# Altium PCB MMS3100加热_V0.1.PcbDoc
Units mil, origin at the board's own origin, x right, y up, seen from the top; angles counter-clockwise.
Board outline 3937.01 x 1968.5 mil, 2 copper layers (Top Layer, Bottom Layer); 55 components, 44 nets, 160 pads, 35 vias.
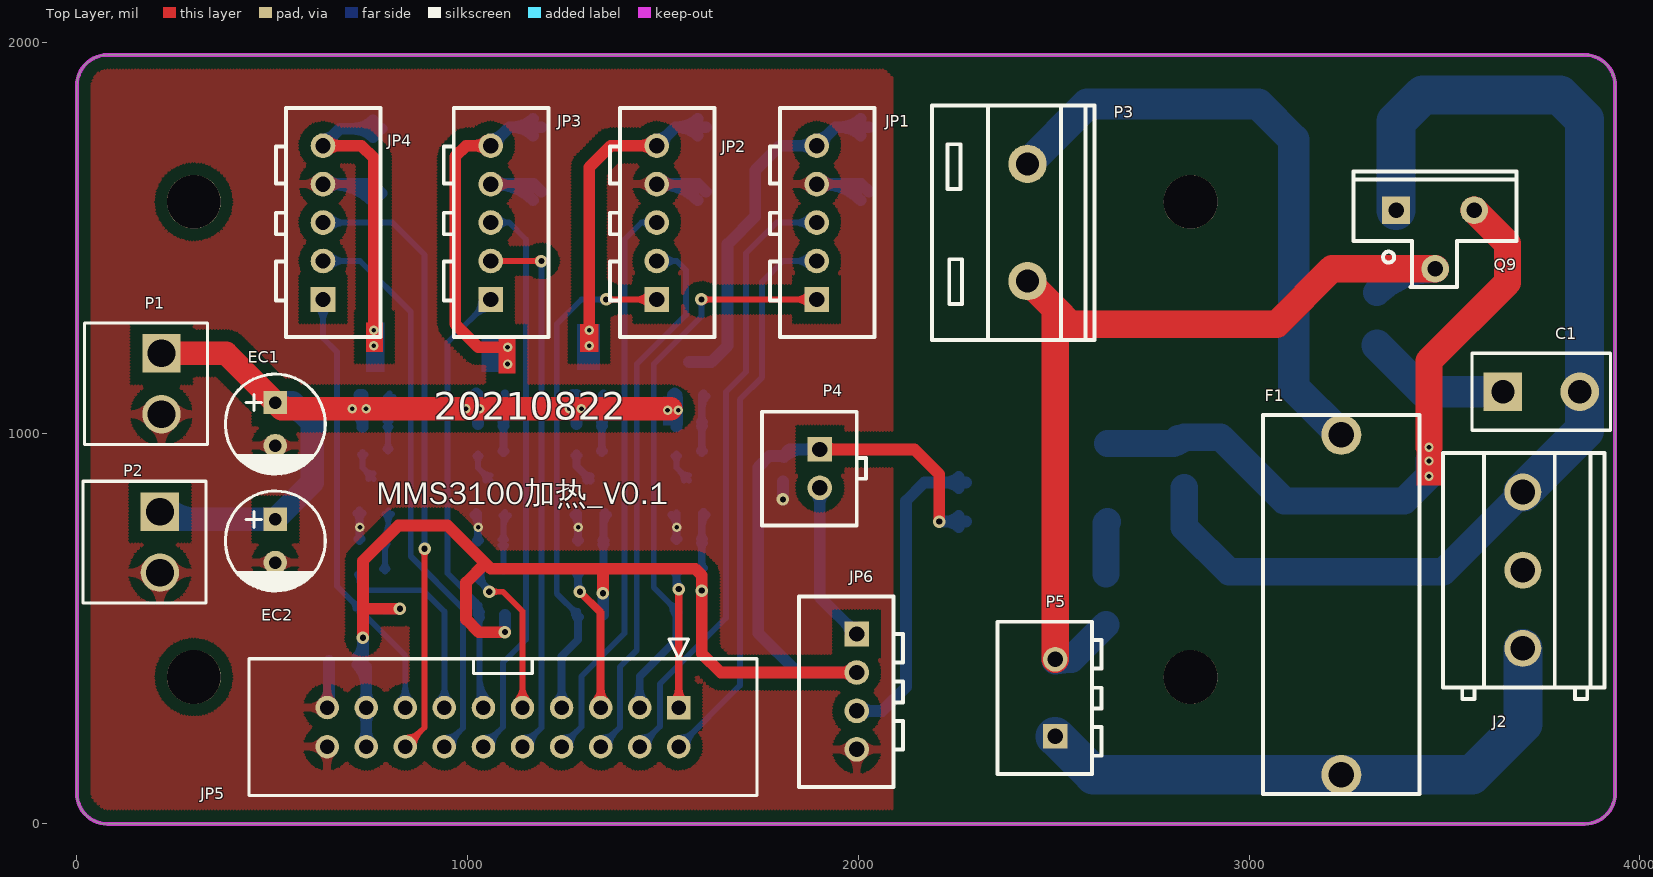
[diagram p0: Top Layer view]
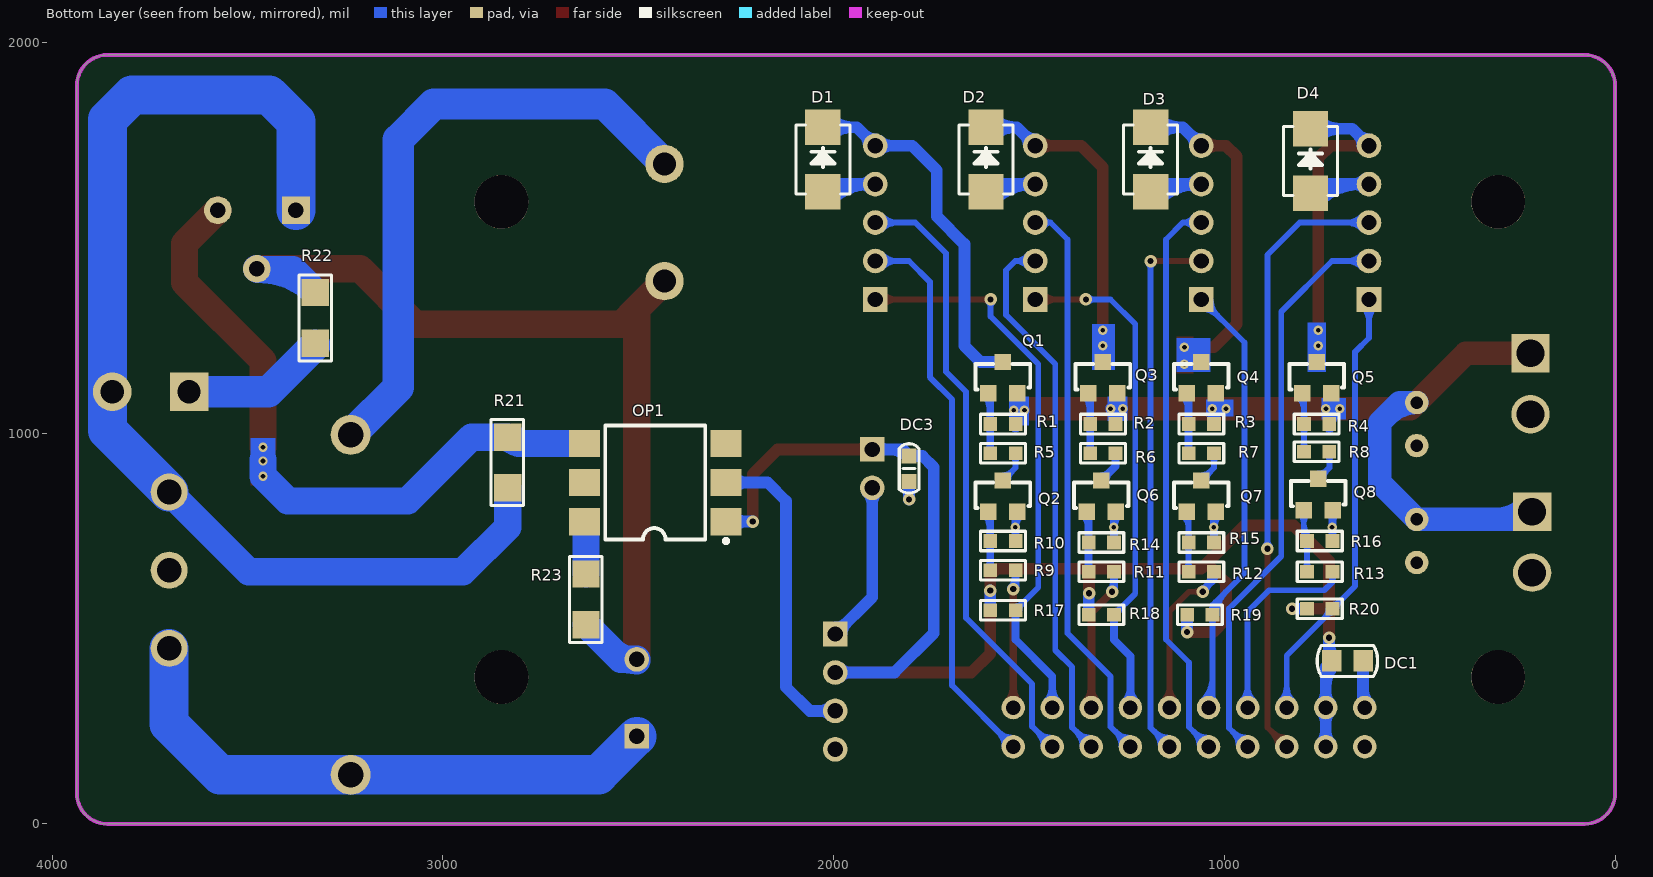
[diagram p1: Bottom Layer view, seen from below]

## Layer stack, top to bottom
Top Layer: signal copper 1.4
Dielectric: dielectric 12.6, FR-4, Dk 4.8
Bottom Layer: signal copper 1.4

## Board outline
0,78.74 0,1889.76 cw(c78.74,1889.76) 78.74,1968.5 3858.27,1968.5 cw(c3858.27,1889.76) 3937.01,1889.76 3937.01,78.74 cw(c3858.27,78.74) 3858.27,0 78.74,0 cw(c78.74,78.74)

## Design rules (kind name [scope] priority, off if disabled: settings)
Clearance Clearance_3 [InComponent('U6')] p1: gap=7
Clearance Clearance_2 [InComponent('J1') vs OnLayer('Keep-Out Layer')] p2: gap=0
Clearance [(InPoly)] p3: gap=30
Clearance Clearance_1 [All] p4: gap=6
FabricationTestPointUsage TestPointUsage [All] p1: valid=0 allowmultiple=FALSE
FabricationTestpoint Testpoint [All] p1: side=3 testpointundercomponent=TRUE minsize=40 maxsize=100 preferedsize=60 minholesize=20 maxholesize=40 preferedholesize=32 testpointgrid=1 allowsidetop=TRUE allowsidebottom=TRUE usegrid=TRUE gridtolerance=0.01
HoleSize [All] p1: absolutevalues=TRUE maxlimit=1000 minlimit=1 maxpercent=80.000 minpercent=20.000
MinimumSolderMaskSliver [All] p1 off: minsoldermaskwidth=10
PlaneConnect [All] p1: planeconnectstyle=Relief reliefexpansion=20 reliefentries=2 reliefconductorwidth=30 reliefairgap=10
PolygonConnect PolygonConnect_1 [InNet('EXT_GND')] p1: connectstyle=Direct reliefconductorwidth=10 reliefentries=4 polygonreliefangle="90 Angle"
PolygonConnect VIA [ViaSize] p2: connectstyle=Direct reliefconductorwidth=10 reliefentries=4 polygonreliefangle="90 Angle"
PolygonConnect [All] p3: connectstyle=Relief reliefconductorwidth=20 reliefentries=4 polygonreliefangle="90 Angle"
RoutingVias [All] p1: holewidth=16 width=30 viastyle="Through Hole" minholewidth=12 minwidth=24 maxholewidth=100 maxwidth=500
SilkToSilkClearance [All] p1 off: silktosilkclearance=10
SilkscreenOverComponentPads [All] p1 off: minsilkscreentomaskgap=10
SolderMaskExpansion [All] p1 off: expansion=4
Width Width_GND [InNet('GND')] p1: maxlimit=100 minlimit=1 preferedwidth=20 minimp=50.000000 maximp=50.000000 favimp=50.000000
Width Width_POWER [InNet('+3.3V') and InNet('VCC')] p2: maxlimit=100 minlimit=10 preferedwidth=20
Width [All] p3: maxlimit=400 minlimit=1 preferedwidth=10
21 further rules are at their usual default settings.

## Components (designator, comment, footprint, x,y, rotation, side; value= is the part's Value field where it differs from the comment)
C1 "0.01uF" 瓷片电容5MM 3649.61,1106.3 r0 top
D1 "SS34" SMA 2027.56,1700.79 r270 bottom
D2 "SS34" SMA 1610.24,1700.79 r270 bottom
D3 "SS34" SMA 1188.98,1700.79 r270 bottom
D4 "SS34" SMA 779.53,1696.85 r270 bottom
DC1 "10uF/16V" C0805 685.04,417.32 r180 bottom
DC3 "0.1uF" C0603 1807.09,909.45 r180 bottom
EC1 "220uF/25V" 16MV220SAX 507.87,1078.74 r270 top
EC2 "220uF/25V" 16MV220SAX 507.87,779.53 r270 top
F1 "Fuse 2" FUSE-2 3236.22,125.98 r90 top
J2 "CON3" KF5.08-3P 3700.79,649.61 r90 top
JP1 "HX25035-5A" HX25035-5A 1893.7,1539.37 r90 top
JP2 "HX25035-5A" HX25035-5A 1484.25,1539.37 r90 top
JP3 "HX25035-5A" HX25035-5A 1059.06,1539.37 r90 top
JP4 "HX25035-5A" HX25035-5A 629.92,1539.37 r90 top
JP5 "NJ-20" 130-20TRK 1090.55,248.03 r180 top
JP6 "XH-4A" HX25035-4A 1996.06,338.58 r270 top
OP1 "MOC3063S" SMD-6 2456.69,874.02 r90 bottom
P1 "Header 2" VH3.96-2 216.54,1204.72 r270 top
P2 "Header 2" VH3.96-2 212.6,799.21 r270 top
P3 "Header 2" WJ129V-7.62-2P 2433.07,1539.37 r270 top
P4 "Header 2" HX25035-2A 1901.57,909.45 r270 top
P5 "Header 2" XH2-220V 2503.94,322.83 r270 top
Q1 "AO3401" SOT-23MOS 1566.93,1102.36 r180 bottom
Q2 "S8050" 8050 1566.93,799.21 r180 bottom
Q3 "AO3401" SOT-23MOS 1311.02,1102.36 r180 bottom
Q4 "AO3401" SOT-23MOS 1059.05,1102.36 r180 bottom
Q5 "AO3401" SOT-23MOS 763.78,1102.36 r180 bottom
Q6 "S8050" 8050 1314.96,799.21 r180 bottom
Q7 "S8050" 8050 1059.05,799.21 r180 bottom
Q8 "S8050" 8050 759.84,803.15 r180 bottom
Q9 "T835-600B-TR" TO-220-3 3476.38,1570.87 r0 top (schematic designator Q1)
R1 "10K" R0603 1566.93,1023.62 r90 bottom
R2 "10K" R0603 1311.02,1023.62 r90 bottom
R3 "10K" R0603 1059.05,1023.62 r90 bottom
R4 "10K" R0603 763.78,1023.62 r90 bottom
R5 "10K" R0603 1566.93,948.82 r270 bottom
R6 "10K" R0603 1311.02,948.82 r270 bottom
R7 "10K" R0603 1059.05,948.82 r270 bottom
R8 "10K" R0603 763.78,952.76 r270 bottom
R9 "4.7K" R0603 1566.93,649.61 r270 bottom
R10 "10K(NC)" R0603 1566.93,724.41 r270 bottom
R11 "4.7K" R0603 1314.96,645.67 r270 bottom
R12 "4.7K" R0603 1059.06,645.67 r270 bottom
R13 "4.7K" R0603 755.91,645.67 r270 bottom
R14 "10K(NC)" R0603 1314.96,720.47 r270 bottom
R15 "10K(NC)" R0603 1059.05,720.47 r270 bottom
R16 "10K(NC)" R0603 755.91,724.41 r270 bottom
R17 "4.7K" R0603 1566.93,547.24 r270 bottom
R18 "4.7K" R0603 1314.96,535.43 r270 bottom
R19 "4.7K" R0603 1062.99,535.43 r270 bottom
R20 "4.7K" R0603 755.91,551.18 r270 bottom
R21 "360R" R1206 2834.65,925.2 r180 bottom
R22 "39R" R1206 3326.77,1295.28 r180 bottom
R23 "360R" R1206 2633.86,574.8 r180 bottom

## Footprints (in the part's own frame and the unit in brackets; to place one, negate y for a bottom-side part, rotate by r counter-clockwise, add the part's x,y. Pads: shape width x height; smd on the part's side, far side on the other; paste and mask are expansions set on the pad)
16MV220SAX [mil]
  rect 60x60 / inner round 60 / far side round 60 hole 32: 1(0,0)
  round 60 hole 32: 2(110.24,0)
  silkscreen extent -73,-128 183,128
130-20TRK [mil]
  rect 60x60 / inner round 60 / far side round 60 hole 37: 1(-450,-50)
  round 60 hole 37: 2(-450,50) 3(-350,-50) 4(-350,50) 5(-250,-50) 6(-250,50) 7(-150,-50) 8(-150,50) 9(-50,-50) 10(-50,50) 11(50,-50) 12(50,50) 13(150,-50) 14(150,50) 15(250,-50) 16(250,50) 17(350,-50) 18(350,50) 19(450,-50) 20(450,50)
  silkscreen extent -650,-225 650,175
8050 [mil]
  rect 42x42 smd: B(-37,0) C(0,80) E(37,0)
  silkscreen extent -70,10 70,75
C0603 [mil]
  rect 38x38 smd: 1(0,32.5) 2(0,-32.5)
  silkscreen extent -25,-62 25,64
C0805 [mil]
  rect 50x55 smd: 1(-40,0) 2(40,0)
  silkscreen extent -77,-39 77,39
FUSE-2 [mm]
  round 2.6 hole 1.651: 1(0,0) 2(22.098,0)
  silkscreen extent -1.25,-5.08 23.4,5.08
HX25035-2A [mm]
  rect 1.6x1.6 hole 1: 1(-1.25,0)
  round 1.6 hole 1: 2(1.25,0)
  silkscreen extent -3.7,-3.75 3.7,3
HX25035-4A [mm]
  rect 1.6x1.6 hole 1: 1(-3.75,0)
  round 1.6 hole 1: 2(-1.25,0) 3(1.25,0) 4(3.75,0)
  silkscreen extent -6.2,-3.75 6.2,3
HX25035-5A [mm]
  rect 1.6x1.6 hole 1: 1(-5,0)
  round 1.6 hole 1: 2(-2.5,0) 3(0,0) 4(2.5,0) 5(5,0)
  silkscreen extent -7.45,-3.75 7.45,3.05
KF5.08-3P [mm]
  round 2.4 hole 1.6: 1(-5.08,0) 2(0,0) 3(5.08,0)
  silkscreen extent -8.38,-5.3 7.62,5.2
R0603 [mil]
  rect 35x35 smd: 1(0,32.5) 2(0,-32.5)
  silkscreen extent -25,-58 25,58
R1206 [mil]
  rect 70x70 smd: 1(0,65) 2(0,-65)
  silkscreen extent -42,-110 41,110
SMA [mm]
  rect 2.3x2.3 smd: 1(2.1,0) 2(-2.1,0)
  silkscreen extent -2.25,-1.75 2.25,1.75
SMD-6 [mm]
  rect 1.78x2 smd: 1(-2.54,-4.6) 2(0,-4.6) 3(2.54,-4.6) 4(2.54,4.6) 5(0,4.6) 6(-2.54,4.6)
  silkscreen extent -3.94,-4.74 3.7,3.25
SOT-23MOS [mil]
  rect 42x42 smd: D(0,80) G(-37,0) S(37,0)
  silkscreen extent -70,10 70,75
TO-220-3 [mm]
  rect 1.8x1.8 hole 1: 1(-2.54,0)
  round 1.8 hole 1: 2(0,-3.81) 3(2.54,0)
  silkscreen extent -5.3,-5 5.3,2.51
VH3.96-2 [mm]
  rect 2.5x2.5 / inner round 2.5 / far side rect 2.5x2.5 hole 1.8: 1(0,0)
  round 2.5 hole 1.8: 2(3.96,0)
  silkscreen extent -1.98,-5 5.94,3
WJ129V-7.62-2P [mm]
  round 2.5 hole 1.5: 1(-3.81,0) 2(3.81,0)
  silkscreen extent -7.61,-6.21 7.64,4.35
XH2-220V [mm]
  rect 1.6x1.6 hole 1: 1(2.5,0)
  round 1.6 hole 1: 2(-2.5,0)
  silkscreen extent -4.95,-3.75 4.95,3
瓷片电容5MM [mm]
  rect 2.5x2.5 hole 1.5: 1(0,0)
  round 2.5 hole 1.5: 2(5,0)
  silkscreen extent -2,-2.5 7,2.5

## Part data
D1 D2 D3 D4: library part DIODE, "Diode"
DC1: library part CAP
DC3: library part CA
EC1 EC2: library part CAP_POL
F1: "Fus"
J2 JP6: library part CON
JP1 JP2 JP3 JP4: library part SIP5
OP1: library part MOC3063
P1 P2 P4: "Header, 2-Pin"
P3 P5: "Header, 2-Pi"
Q1 Q3 Q4 Q5: library part MOSFET-P, "P-Channel MOSFET"
Q2 Q6 Q7 Q8: library part NPN8050
R1 R2 R3 R4 R5 R6 R7 R8 R9 R10 R11 R12 R13 R14 R15 R16 R17 R18 R19 R20: library part R

## Free pads (board coordinates)
  round 137.8 hole 137.8: 0(299.21,1592.52) 1(299.21,375.98) 2(2850.39,375.98) 3(2850.39,1592.52)

## Via types
v1: diameter 24, hole 12, Top Layer to Bottom Layer, 21 vias
v2: diameter 32, hole 16, Top Layer to Bottom Layer, 14 vias

## Nets (pads, with @x,y where several pads share a name; then routed paths per layer and width w, separated by ;. In a path a pad name is that pad's centre, name@x,y a point inside that pad or via, vN(x,y) a via of type N, cw(c..) or ccw(c..) an arc to the next point about the centre after c; other vN are vias at no path point)
12V: EC1.1 EC2.1 P1.1 P2.1 Q1.S Q3.S Q4.S Q5.S R1.2 R2.2 R3.2 R4.2 | length 3069.4
  Top Layer w60: P1.1 381.89,1204.72 EC1.1 ; 545.89,1062.99 cw(c545.89,1116.76) EC1.1 ; v1@1519.69,1062.99 v1(1291.34,1062.99) v1(1259.84,1062.99) v1(1031.5,1062.99) v1(996.06,1062.99) v1(740.16,1062.99) v1(704.72,1062.99) 523.62,1062.99 EC1.1
  Bottom Layer w30: v1@705.84,1060.21 ccw(c690.69,1097.86) 731.28,1097.86 R4.2 ; v1@706.54,1065.38 cw(c668.64,1015.51) R4.2@731.28,1015.51 ; Q5.S@722.54,1098.12 cw(c701.43,1077.01) 731.28,1077.01 ; 731.28,1048.8 cw(c754.35,1048.8) v1@738.04,1065.11 ; 731.28,1077.18 ccw(c754.35,1077.18) v1@738.04,1060.87 ; Q4.S@1017.81,1098.12 cw(c996.71,1077.01) 1026.56,1077.01 ; Q4.S 1026.55,1097.86 R3.2 ; v1@1261.83,1060.75 ccw(c1228.92,1097.86) 1278.52,1097.86 R2.2 ; v1@1261.96,1065.11 cw(c1221.99,1025.13) R2.2@1278.52,1025.13 ; Q3.S@1269.78,1098.12 cw(c1248.67,1077.01) 1278.52,1077.01 ; R2.2@1278.52,1039.3 cw(c1315.03,1039.3) v1@1289.22,1065.11 ; Q3.S@1278.52,1086.69 ccw(c1315.03,1086.69) v1@1289.22,1060.87 ; v1@1513.59,1056.64 ccw(c1483.24,1097.86) Q1.S@1534.43,1097.86 ; v1@1513.74,1061.35 cw(c1476.59,1017.02) R1.2@1534.43,1017.02 ; Q1.S@1525.69,1098.12 cw(c1504.58,1077.01) 1534.43,1077.01 ; Q1.S Q1.S@1534.43,1097.86 ; R1.2 Q1.S@1534.43,1097.86
  Bottom Layer w60: P2.1 232.28,779.53 EC2.1 602.36,874.02 602.36,1027.56 551.18,1078.74 EC1.1 cw(c507.87,974.19) 581.8,1048.12 ; P2.1@226.18,812.8 ccw(c306.51,893.12) 306.51,779.53
  other v1: 1511.81,1059.06 1539.37,1059.06
CW1: JP1.3 JP5.4 | length 1765.3
  Bottom Layer w15: JP5.4 1492.13,249.61 1492.13,358.27 1661.42,527.56 1661.42,1106.3 1712.6,1157.48 1712.6,1460.63 1791.34,1539.37 JP1.3 ; JP5.4@1440.55,220.53 ccw(c1440.55,274.85) 1478.96,236.44 ccw(c1517.37,198.03) JP5.4@1463.05,198.03 ; JP1.3@1876.73,1522.4 ccw(c1835.77,1481.44) 1835.77,1539.37 ccw(c1835.77,1597.3) JP1.3@1876.73,1556.34
CW2: JP2.3 JP5.8 | length 1595.1
  Bottom Layer w15: JP5.8 1291.34,248.82 1291.34,377.95 1401.57,488.19 1401.57,1496.06 1444.88,1539.37 ; JP5.8@1240.55,220.53 ccw(c1240.55,274.85) 1278.96,236.44 ccw(c1317.37,198.03) JP5.8@1263.05,198.03 ; JP2.3@1462.92,1528.37 ccw(c1444.88,1519.07) 1444.88,1539.37 ; JP2.3@1462.92,1550.37 cw(c1444.88,1559.67) 1444.88,1539.37 ; JP2.3 1444.88,1539.37
CW3: JP3.3 JP5.12 | length 1601.9
  Bottom Layer w15: JP5.12 1090.55,248.03 1090.55,413.39 1149.61,472.44 1149.61,1496.06 1106.3,1539.37 ; JP5.12@1040.55,220.53 ccw(c1040.55,274.85) 1078.96,236.44 ccw(c1117.37,198.03) JP5.12@1063.05,198.03 ; JP3.3 1106.3,1539.37 ; JP3.3@1078.43,1525.22 cw(c1106.3,1504.87) 1106.3,1539.37 ; JP3.3@1078.43,1553.52 ccw(c1106.3,1573.87) 1106.3,1539.37
CW4: JP4.3 JP5.16 | length 1813.9
  Top Layer w15: JP5.16 889.76,247.24 v2(889.76,704.72) ; JP5.16@840.55,220.53 ccw(c840.55,274.85) 878.96,236.44 ccw(c917.37,198.03) JP5.16@863.05,198.03 ; v2@883.75,698.71 cw(c869.24,684.2) 889.76,684.2 cw(c910.28,684.2) v2@895.77,698.71
  Bottom Layer w15: JP4.3 807.09,1539.37 889.76,1456.69 v2(889.76,704.72) ; JP4.3@646.89,1522.4 cw(c687.85,1481.44) 687.85,1539.37 cw(c687.85,1597.3) JP4.3@646.89,1556.34 ; v2@883.75,710.73 ccw(c869.24,725.25) 889.76,725.25 ccw(c910.28,725.25) v2@895.77,710.73
FG1: JP1.1 JP5.3 R17.1 | length 1750.9
  Top Layer w15: v2(1598.43,1342.52) JP1.1 ; v2@1604.44,1336.51 cw(c1618.95,1322) 1618.95,1342.52 cw(c1618.95,1363.04) v2@1604.44,1348.53 ; JP1.1@1876.73,1325.55 ccw(c1835.77,1284.59) 1835.77,1342.52 ccw(c1835.77,1400.45) JP1.1@1876.73,1359.49
  Bottom Layer w15: R17.1@1524.43,547.24 ccw(c1500.29,547.24) 1517.36,564.32 ccw(c1534.43,581.39) R17.1@1534.43,557.24 ; R17.1 1476.38,605.3 1476.38,1177.17 1598.43,1299.21 v2(1598.43,1342.52) ; v2@1592.41,1336.51 cw(c1577.9,1322) 1598.43,1322 cw(c1618.95,1322) v2@1604.44,1336.51
  Bottom Layer w20: JP5.3@1426.41,312.17 ccw(c1392.27,346.32) 1440.55,346.32 ccw(c1488.84,346.32) JP5.3@1454.69,312.17 ; JP5.3 1440.55,377.56 1534.43,471.44 R17.1 ; R17.1@1529.13,541.94 cw(c1516.32,529.14) 1534.43,529.14 cw(c1552.54,529.14) R17.1@1539.73,541.94
FG2: JP2.1 JP5.7 R18.1 | length 1600.9
  Top Layer w15: v2(1354.33,1342.52) JP2.1 ; v2@1360.34,1336.51 cw(c1374.85,1322) 1374.85,1342.52 cw(c1374.85,1363.04) v2@1360.34,1348.53 ; JP2.1@1467.28,1325.55 ccw(c1426.32,1284.59) 1426.32,1342.52 ccw(c1426.32,1400.45) JP2.1@1467.28,1359.49
  Bottom Layer w15: R18.1@1272.46,535.43 ccw(c1248.32,535.43) 1265.39,552.5 ccw(c1282.46,569.58) R18.1@1282.46,545.43 ; R18.1 1228.35,589.55 1228.35,1279.53 1291.34,1342.52 v2(1354.33,1342.52) ; v2@1348.32,1336.51 ccw(c1333.81,1322) 1333.81,1342.52 ccw(c1333.81,1363.04) v2@1348.32,1348.53
  Bottom Layer w20: JP5.7@1226.41,312.17 ccw(c1192.27,346.32) 1240.55,346.32 ccw(c1288.84,346.32) JP5.7@1254.69,312.17 ; JP5.7 1240.55,429.53 1282.46,471.44 R18.1 ; R18.1@1277.16,530.13 cw(c1264.35,517.33) 1282.46,517.33 cw(c1300.57,517.33) R18.1@1287.76,530.13
FG3: JP3.1 JP5.11 R19.1 | length 1524.4
  Bottom Layer w15: 996.01,594.54 cw(c936.9,535.43) R19.1@1020.49,535.43 ; 1021.61,568.94 cw(c988.11,535.43) R19.1@1035.49,535.43 ; R19.1@1023.42,528.36 cw(c1006.35,511.29) 1030.49,511.29 cw(c1054.63,511.29) R19.1@1037.56,528.36 ; R19.1@1023.42,542.5 ccw(c1006.35,559.58) 1030.49,559.58 ccw(c1054.63,559.58) R19.1@1037.56,542.5 ; JP5.11@1024.64,313.94 ccw(c1010.52,328.07) 1030.49,328.07 ; 1030.49,340.42 ccw(c1082.94,340.42) JP5.11@1045.85,303.33 ; 1030.49,376.64 ccw(c1119.16,376.64) JP5.11@1056.46,313.94 ; JP3.1@1035.06,1342.52 cw(c977.13,1342.52) 1018.09,1301.56 cw(c1059.06,1260.59) JP3.1@1059.06,1318.52 ; JP5.11 1030.49,308.09 R19.1 1030.49,560.06 948.82,641.73 948.82,1232.28 JP3.1
FG4: JP4.1 JP5.15 R20.1 | length 1383.9
  Bottom Layer w15: JP4.1@612.95,1325.55 cw(c571.99,1284.59) 629.92,1284.59 cw(c687.85,1284.59) JP4.1@646.89,1325.55 ; JP4.1 629.92,1244.09 665.35,1208.66 665.35,609.23 R20.1 723.41,548.25 840.55,431.1 JP5.15 ; R20.1@713.41,551.18 ccw(c689.26,551.18) 706.33,568.25 ccw(c723.41,585.32) R20.1@723.41,561.18 ; R20.1@723.41,541.18 cw(c723.41,524.12) R20.1@735.47,536.18 ; R20.1@733.41,551.18 ccw(c764.63,551.18) 742.55,529.1 ; JP5.15@824.64,313.94 ccw(c786.23,352.35) 840.55,352.35 ccw(c894.87,352.35) JP5.15@856.46,313.94
GND: D1.1 D2.1 D3.1 D4.1 DC1.2 DC3.2 EC1.2 EC2.2 JP1.4 JP2.4 JP3.4 JP4.4 JP5.19 JP5.20 JP6.4 P1.2 P2.2 Q2.E Q6.E Q7.E Q8.E R10.1 R14.1 R15.1 R16.1 | length 2271.6
  Bottom Layer w20: Q8.E@715.06,795.37 cw(c694.93,775.23) 723.41,775.23 ; R16.1@718.1,729.71 ccw(c705.3,742.52) 723.41,742.52 ccw(c741.51,742.52) R16.1@728.71,729.71 ; Q8.E 723.41,802.59 R16.1 ; 723.41,777.95 cw(c748.04,777.95) Q8.E@730.62,795.37 ; Q7.E@1014.28,791.43 cw(c984.63,761.79) v1@1026.56,761.79 ; R15.1@1021.25,725.78 ccw(c1008.45,738.58) 1026.56,738.58 ccw(c1044.66,738.58) R15.1@1031.86,725.78 ; Q7.E 1026.55,794.71 R15.1 ; Q6.E@1270.18,791.43 cw(c1240.54,761.79) v1@1282.46,761.79 ; R14.1@1277.16,725.78 ccw(c1264.35,738.58) 1282.46,738.58 ccw(c1300.57,738.58) R14.1@1287.76,725.78 ; Q6.E 1282.46,794.71 R14.1 ; Q2.E@1522.15,791.43 cw(c1492.51,761.79) v1@1534.43,761.79 ; R10.1@1529.13,729.71 ccw(c1516.32,742.52) 1534.43,742.52 ccw(c1552.54,742.52) R10.1@1539.73,729.71 ; R10.1 Q2.E@1534.43,794.71
  Bottom Layer w30: JP4.4 755.91,1637.8 D4.1 ; JP5.19@629.94,308.64 ccw(c593.5,345.08) 645.04,345.08 ; JP5.19 645.04,302.52 DC1.2 ; JP4.4@641.59,1626.13 cw(c669.75,1597.97) 669.75,1637.8 cw(c669.75,1677.62) JP4.4@641.59,1649.46 ; JP4.4@649.41,1637.8 cw(c649.41,1484.05) D4.1@758.12,1592.77 ; 721.83,1637.8 cw(c721.83,1556.48) D4.1@779.33,1613.98 ; JP3.4 1169.29,1637.8 D3.1 ; JP3.4@1068.36,1637.8 cw(c1068.36,1497.49) D3.1@1167.57,1596.7 ; JP3.4@1070.72,1626.13 cw(c1098.88,1597.97) 1098.88,1637.8 cw(c1098.88,1677.62) JP3.4@1070.72,1649.46 ; 1140.79,1637.8 cw(c1140.79,1569.92) D3.1@1188.78,1617.92 ; JP2.4 1590.55,1637.8 D2.1 ; JP2.4@1489.62,1637.8 cw(c1489.62,1497.49) D2.1@1588.83,1596.7 ; JP2.4@1495.92,1626.13 cw(c1524.08,1597.97) 1524.08,1637.8 cw(c1524.08,1677.62) JP2.4@1495.92,1649.46 ; 1562.05,1637.8 cw(c1562.05,1569.92) D2.1@1610.04,1617.92 ; v2(1807.09,830.71) DC3.2 ; JP1.4 2007.87,1637.8 D1.1 ; JP1.4@1905.36,1626.13 cw(c1933.53,1597.97) 1933.53,1637.8 cw(c1933.53,1677.62) JP1.4@1905.36,1649.46 ; JP1.4@1906.94,1637.8 cw(c1906.94,1497.49) D1.1@2006.15,1596.7 ; 1979.37,1637.8 cw(c1979.37,1569.92) D1.1@2027.36,1617.92
  other v1: 724.41,759.84 1027.56,759.84 1283.46,759.84 1535.43,759.84
HEAT_PWM: JP6.3 OP1.2 | length 939.3
  Bottom Layer w30: JP6.3 2061.02,289.37 2122.05,350.39 2122.05,826.77 2169.29,874.02 OP1.2 ; JP6.3@2007.73,277.71 cw(c2035.89,249.54) 2035.89,289.37 cw(c2035.89,329.19) JP6.3@2007.73,301.03 ; OP1.2@2257.09,859.85 ccw(c2222.88,825.64) 2222.88,874.02 ccw(c2222.88,922.4) OP1.2@2257.09,888.19
L_IN: F1.1 J2.1 P5.1 | length 1485.1
  Bottom Layer w100: P5.1 2602.36,125.98 F1.1 3570.87,125.98 3700.79,255.91 J2.1
MO1: JP5.1 R9.1 | length 486.2
  Top Layer w20: JP5.1@1526.41,312.17 ccw(c1492.27,346.32) 1540.55,346.32 ccw(c1588.84,346.32) JP5.1@1554.69,312.17 ; JP5.1 v2(1540.55,601.18)
  Bottom Layer w20: R9.1@1529.13,644.3 cw(c1516.32,631.5) 1534.43,631.5 cw(c1552.54,631.5) R9.1@1539.73,644.3 ; 1534.43,630.45 ccw(c1569.82,630.45) v2@1544.79,605.42 ; R9.1 1534.43,607.3 v2(1540.55,601.18)
MO2: JP5.5 R11.1 | length 500.6
  Top Layer w20: v2(1287.4,594.49) 1340.55,541.34 JP5.5 ; JP5.5@1326.41,312.17 ccw(c1292.27,346.32) 1340.55,346.32 ccw(c1388.84,346.32) JP5.5@1354.69,312.17
  Bottom Layer w20: R11.1@1277.16,640.37 cw(c1264.35,627.56) 1282.46,627.56 cw(c1300.57,627.56) R11.1@1287.76,640.37 ; 1282.46,620.9 ccw(c1313.82,620.9) v2@1291.64,598.73 ; R11.1 1282.46,599.43 v2(1287.4,594.49)
MO3: JP5.9 R12.1 | length 718.7
  Top Layer w15: v2(1055.12,594.49) 1090.55,594.49 1140.55,544.49 JP5.9 ; v2@1061.13,588.48 cw(c1075.64,573.97) 1075.64,594.49 cw(c1075.64,615.01) v2@1061.13,600.5 ; JP5.9@1124.64,313.94 ccw(c1086.23,352.35) 1140.55,352.35 ccw(c1194.87,352.35) JP5.9@1156.46,313.94
  Bottom Layer w15: R12.1@1019.83,638.27 cw(c1005.98,623.05) 1026.56,623.05 ; R12.1@1021.57,646.06 ccw(c1057.82,643.21) 1032.11,617.5 ; R12.1 1026.56,623.05 ; R12.1@1033.28,638.27 ccw(c1047.13,623.05) 1026.56,623.05 ; R12.1@1036.52,644.88 ccw(c1100.48,639.85) v2(1055.12,594.49) 1026.56,623.05 ; v2@1046.62,594.49 ccw(c1026.1,594.49) 1040.61,609 ccw(c1055.12,623.51) v2@1055.12,602.99 ; v2@1046.91,596.69 ccw(c1027.09,602) 1044.86,612.26 ccw(c1062.63,622.52) v2@1057.32,602.7
MO4: JP5.13 R13.1 | length 643.9
  Bottom Layer w15: R13.1@716.33,638.6 cw(c699.26,621.53) 723.41,621.53 cw(c747.55,621.53) R13.1@730.48,638.6 ; R13.1 723.41,619.11 744.09,598.43 885.83,598.43 940.55,543.7 JP5.13 ; JP5.13@924.64,313.94 ccw(c886.23,352.35) 940.55,352.35 ccw(c994.87,352.35) JP5.13@956.46,313.94
MOC-6: OP1.6 R23.1 | length 135.8
  Bottom Layer w70: R23.1 2633.86,770.08 OP1.6
MOT1: D1.2 JP1.5 Q1.D | length 1170.9
  Bottom Layer w30: Q1.D 1623.31,1182.36 1665.35,1224.41 1665.35,1484.25 1736.22,1555.12 1736.22,1673.23 1799.21,1736.22 JP1.5 1940.94,1783.46 D1.2 ; JP1.5@1882.04,1724.56 ccw(c1853.88,1696.4) 1853.88,1736.22 ccw(c1853.88,1776.05) JP1.5@1882.04,1747.89 ; JP1.5@1893.7,1752.72 ccw(c1893.7,1792.54) 1921.86,1764.38 ccw(c1950.02,1736.22) JP1.5@1910.2,1736.22 ; D1.2@2006.15,1762.06 ccw(c1954.47,1710.37) 1954.47,1783.46 ccw(c1954.47,1856.56) D1.2@2006.15,1804.87
MOT2: D2.2 JP2.5 Q3.D | length 998.9
  Top Layer w30: v1(1311.02,1263.78) 1311.02,1681.1 1366.14,1736.22 JP2.5 ; JP2.5@1472.59,1724.56 ccw(c1444.43,1696.4) 1444.43,1736.22 ccw(c1444.43,1776.05) JP2.5@1472.59,1747.89
  Bottom Layer w30: JP2.5 1531.5,1783.46 D2.2 ; JP2.5@1484.25,1752.72 ccw(c1484.25,1792.54) 1512.41,1764.38 ccw(c1540.57,1736.22) JP2.5@1500.75,1736.22 ; D2.2@1588.83,1762.06 ccw(c1537.14,1710.37) 1537.14,1783.46 ccw(c1537.14,1856.56) D2.2@1588.83,1804.87
  other v1: 1311.02,1224.41
MOT3: D3.2 JP3.5 Q4.D | length 1078.8
  Top Layer w30: JP3.5@1047.39,1724.56 ccw(c1019.23,1696.4) 1019.23,1736.22 ccw(c1019.23,1776.05) JP3.5@1047.39,1747.89 ; JP3.5 996.06,1736.22 968.5,1708.66 968.5,1279.53 1027.56,1220.47 v1(1102.36,1220.47)
  Bottom Layer w30: JP3.5 1106.3,1783.46 D3.2 ; JP3.5@1059.06,1752.72 ccw(c1059.06,1792.54) 1087.22,1764.38 ccw(c1115.38,1736.22) JP3.5@1075.55,1736.22 ; D3.2@1167.57,1762.06 ccw(c1115.88,1710.37) 1115.88,1783.46 ccw(c1115.88,1856.56) D3.2@1167.57,1804.87
  other v1: 1102.36,1177.17
MOT4: D4.2 JP4.5 Q5.D | length 991.4
  Top Layer w30: JP4.5 728.35,1736.22 759.84,1704.72 v1(759.84,1263.78) ; JP4.5@641.59,1724.56 cw(c669.75,1696.4) 669.75,1736.22 cw(c669.75,1776.05) JP4.5@641.59,1747.89
  Bottom Layer w30: JP4.5 673.23,1779.53 D4.2 ; JP4.5@629.92,1752.72 ccw(c629.92,1792.54) 658.08,1764.38 ccw(c686.24,1736.22) JP4.5@646.42,1736.22 ; D4.2@758.12,1758.12 ccw(c706.44,1706.44) 706.44,1779.53 ccw(c706.44,1852.62) D4.2@758.12,1800.94
  other v1: 759.84,1224.41
N: P3.2 P5.2 Q9.2 R22.1 R23.2 | length 2609.7
  Top Layer w70: P3.2 2503.94,1318.5 ; P5.2 2503.94,1318.5 ; Q9.2 3212.2,1420.87 3070.87,1279.53 2542.91,1279.53 2503.94,1318.5
  Bottom Layer w70: P5.2@2503.94,417.75 ccw(c2503.94,509.18) 2568.59,444.53 ; P5.2 2545.31,421.26 R23.2 ; R22.1 cw(c3469.34,1217.7) Q9.2@3469.34,1419.33 ; R22.1@3330.71,1366.14 3383.9,1419.33 3474.84,1419.33 Q9.2
NetC1_1: C1.1 R22.2 | length 376.8
  Bottom Layer w80: R22.2@3327.74,1225.37 3446.81,1106.3 C1.1 C1.1@3653.54,1110.24
NetC1_2: C1.2 J2.3 Q9.1 R21.2 | length 2880.2
  Bottom Layer w70: R21.2 2834.65,759.84 2948.82,645.67 3496.85,645.67 J2.3
  Bottom Layer w100: Q9.1 3376.38,1797.64 3444.88,1866.14 3795.28,1866.14 3858.27,1803.15 3858.27,1007.09 J2.3
NetF1_2: F1.2 P3.1 | length 1588.6
  Bottom Layer w80: P3.1 2586.22,1842.52 3023.62,1842.52 3114.17,1751.97 3114.17,1118.03 F1.2
NetOP1_4: OP1.4 Q9.3 R21.1 | length 1717.3
  Top Layer w70: v1(3460.63,964.57) 3460.63,1185.04 3661.42,1385.83 3661.42,1485.83 Q9.3
  Bottom Layer w70: OP1.4 2806.73,974.02 R21.1@2818.9,986.18 ; 2795.58,974.02 ccw(c2795.58,1029.26) R21.1 2927.13,990.2 3090.55,826.77 3397.64,826.77 v1(3460.63,889.76) v1(3460.63,929.13) v1@3460.63,933.07
NetQ1_G: Q1.G R1.1 R5.2 | length 273.7
  Bottom Layer w20: R5.2@1594.13,954.12 ccw(c1581.32,966.93) 1599.43,966.93 ccw(c1617.54,966.93) R5.2@1604.73,954.12 ; R1.1@1594.13,1018.32 cw(c1581.32,1005.52) 1599.43,1005.52 cw(c1617.54,1005.52) R1.1@1604.73,1018.32 ; R1.1@1594.13,1028.93 ccw(c1581.32,1041.73) 1599.43,1041.73 ccw(c1617.54,1041.73) R1.1@1604.73,1028.93 ; R5.2 R1.1 1599.43,1097.86 Q1.G ; 1599.43,1064.94 cw(c1641.35,1064.94) Q1.G@1611.71,1094.58
NetQ2_B: Q2.B R9.2 R10.2 | length 269.7
  Bottom Layer w20: R9.2@1594.13,654.91 ccw(c1581.32,667.71) 1599.43,667.71 ccw(c1617.54,667.71) R9.2@1604.73,654.91 ; R10.2@1594.13,719.11 cw(c1581.32,706.3) 1599.43,706.3 cw(c1617.54,706.3) R10.2@1604.73,719.11 ; R10.2@1594.13,729.71 ccw(c1581.32,742.52) 1599.43,742.52 ccw(c1617.54,742.52) R10.2@1604.73,729.71 ; R9.2 R10.2 1599.43,794.71 Q2.B ; 1599.43,761.79 cw(c1641.35,761.79) Q2.B@1611.71,791.43
NetQ2_C: Q2.C R5.1 | length 172.2
  Bottom Layer w15: R5.1@1527.36,941.75 cw(c1510.29,924.68) 1534.43,924.68 cw(c1558.57,924.68) R5.1@1541.5,941.75 ; R5.1 1534.43,911.71 Q2.C ; Q2.C@1553.43,879.21 ccw(c1520.84,879.21) 1543.88,902.26 ccw(c1566.93,925.3) Q2.C@1566.93,892.71
NetQ3_G: Q3.G R2.1 R6.2 | length 273.7
  Bottom Layer w20: R6.2@1338.22,954.12 ccw(c1325.42,966.93) 1343.52,966.93 ccw(c1361.63,966.93) R6.2@1348.83,954.12 ; R2.1@1338.22,1018.32 cw(c1325.42,1005.52) 1343.52,1005.52 cw(c1361.63,1005.52) R2.1@1348.83,1018.32 ; R2.1@1338.22,1028.93 ccw(c1325.42,1041.73) 1343.52,1041.73 ccw(c1361.63,1041.73) R2.1@1348.83,1028.93 ; R6.2 R2.1 1343.52,1097.86 Q3.G ; 1343.52,1064.94 cw(c1385.44,1064.94) Q3.G@1355.8,1094.58
NetQ4_G: Q4.G R3.1 R7.2 | length 273.7
  Bottom Layer w20: R7.2@1086.25,954.12 ccw(c1073.45,966.93) 1091.56,966.93 ccw(c1109.66,966.93) R7.2@1096.86,954.12 ; R3.1@1086.25,1018.32 cw(c1073.45,1005.52) 1091.56,1005.52 cw(c1109.66,1005.52) R3.1@1096.86,1018.32 ; R3.1@1086.25,1028.93 ccw(c1073.45,1041.73) 1091.56,1041.73 ccw(c1109.66,1041.73) R3.1@1096.86,1028.93 ; R7.2 R3.1 1091.55,1097.86 Q4.G ; 1091.56,1064.94 cw(c1133.48,1064.94) Q4.G@1103.83,1094.58
NetQ5_G: Q5.G R4.1 R8.2 | length 316.4
  Bottom Layer w15: R8.2@789.21,959.83 ccw(c772.14,976.9) 796.28,976.9 ccw(c820.42,976.9) R8.2@803.35,959.83 ; R4.1@789.21,1016.55 cw(c772.14,999.48) 796.28,999.48 cw(c820.42,999.48) R4.1@803.35,1016.55 ; R4.1@789.21,1030.69 ccw(c772.14,1047.76) 796.28,1047.76 ccw(c820.42,1047.76) R4.1@803.35,1030.69 ; Q5.G@791.23,1092.82 cw(c779.05,1080.63) 796.28,1080.63 ; R8.2 R4.1 796.28,1097.86 Q5.G ; 796.28,1058.91 cw(c844.24,1058.91) Q5.G@810.33,1092.82
NetQ6_B: Q6.B R11.2 R14.2 | length 273.7
  Bottom Layer w20: R11.2@1342.16,650.97 ccw(c1329.35,663.78) 1347.46,663.78 ccw(c1365.57,663.78) R11.2@1352.76,650.97 ; R14.2@1342.16,715.17 cw(c1329.35,702.37) 1347.46,702.37 cw(c1365.57,702.37) R14.2@1352.76,715.17 ; R14.2@1342.16,725.78 ccw(c1329.35,738.58) 1347.46,738.58 ccw(c1365.57,738.58) R14.2@1352.76,725.78 ; R11.2 R14.2 1347.46,794.71 Q6.B ; 1347.46,761.79 cw(c1389.38,761.79) Q6.B@1359.74,791.43
NetQ6_C: Q6.C R6.1 | length 154.9
  Bottom Layer w20: R6.1@1273.22,943.52 cw(c1260.42,930.71) 1278.52,930.71 cw(c1296.63,930.71) R6.1@1283.83,943.52 ; R6.1 1278.52,915.65 Q6.C ; Q6.C@1303.96,879.21 ccw(c1277.4,879.21) 1296.18,897.99 ccw(c1314.96,916.77) Q6.C@1314.96,890.21
NetQ7_B: Q7.B R12.2 R15.2 | length 320.4
  Bottom Layer w15: R12.2@1084.48,652.74 ccw(c1067.41,669.81) 1091.56,669.81 ccw(c1115.7,669.81) R12.2@1098.63,652.74 ; R15.2@1084.48,713.4 cw(c1067.41,696.33) 1091.55,696.33 cw(c1115.7,696.33) R15.2@1098.63,713.4 ; R15.2@1084.48,727.54 ccw(c1067.41,744.61) 1091.55,744.61 ccw(c1115.7,744.61) R15.2@1098.63,727.54 ; Q7.B@1086.51,789.67 cw(c1074.33,777.48) 1091.56,777.48 ; R12.2 1091.56,794.71 Q7.B ; 1091.56,755.76 cw(c1139.51,755.76) Q7.B@1105.6,789.67
NetQ7_C: Q7.C R7.1 | length 172.2
  Bottom Layer w15: R7.1@1019.48,941.75 cw(c1002.41,924.68) 1026.55,924.68 cw(c1050.7,924.68) R7.1@1033.63,941.75 ; R7.1 1026.55,911.71 Q7.C ; Q7.C@1045.55,879.21 ccw(c1012.96,879.21) 1036.01,902.26 ccw(c1059.05,925.3) Q7.C@1059.05,892.71
NetQ8_B: Q8.B R13.2 R16.2 | length 329.6
  Bottom Layer w15: R13.2@781.33,652.74 ccw(c764.26,669.81) 788.41,669.81 ccw(c812.55,669.81) R13.2@795.48,652.74 ; R16.2@781.33,717.34 cw(c764.26,700.27) 788.41,700.27 cw(c812.55,700.27) R16.2@795.48,717.34 ; R16.2@781.33,731.48 ccw(c743.89,768.92) 796.84,768.92 ; Q8.B@787.3,793.6 cw(c764.25,770.56) 796.84,770.56 cw(c829.43,770.56) Q8.B@806.39,793.6 ; R13.2 R16.2 796.84,732.85 Q8.B
NetQ8_C: Q8.C R8.1 | length 170.6
  Bottom Layer w15: R8.1@724.21,945.68 cw(c707.14,928.61) 731.28,928.61 cw(c755.42,928.61) R8.1@738.35,945.68 ; R8.1 731.28,911.71 Q8.C ; Q8.C@746.34,883.15 ccw(c713.75,883.15) 736.8,906.2 ccw(c759.84,929.24) Q8.C@759.84,896.65
PWM1: JP1.2 JP5.2 | length 1616.3
  Bottom Layer w15: JP5.2 1696.85,354.33 1696.85,1086.61 1753.94,1143.7 1753.94,1387.8 1807.09,1440.94 JP1.2 ; JP5.2@1540.55,220.53 ccw(c1540.55,274.85) 1578.96,236.44 ccw(c1617.37,198.03) JP5.2@1563.05,198.03 ; JP1.2@1876.73,1423.98 ccw(c1835.77,1383.01) 1835.77,1440.94 ccw(c1835.77,1498.88) JP1.2@1876.73,1457.91
PWM2: JP2.2 JP5.6 | length 1554.4
  Bottom Layer w15: JP5.6 1389.76,247.24 1389.76,401.57 1433.07,444.88 1433.07,1177.17 1559.06,1303.15 1559.06,1417.32 1535.43,1440.94 ; JP5.6@1340.55,220.53 ccw(c1340.55,274.85) 1378.96,236.44 ccw(c1417.37,198.03) JP5.6@1363.05,198.03 ; JP2.2 1535.43,1440.94 ; JP2.2@1502.7,1425.6 cw(c1535.43,1398.36) 1535.43,1440.94 ; JP2.2@1502.7,1456.29 ccw(c1535.43,1483.52) 1535.43,1440.94
PWM3: JP3.2 JP5.10 | length 1542.7
  Top Layer w15: JP3.2 v2(1188.98,1440.94) ; v2@1182.97,1434.93 ccw(c1168.46,1420.42) 1168.46,1440.94 ccw(c1168.46,1461.47) v2@1182.97,1446.96
  Bottom Layer w15: JP5.10 1188.98,246.46 v2(1188.98,1440.94) ; JP5.10@1140.55,220.53 ccw(c1140.55,274.85) 1178.96,236.44 ccw(c1217.37,198.03) JP5.10@1163.05,198.03 ; v2@1182.97,1434.93 cw(c1168.46,1420.42) 1188.98,1420.42 cw(c1209.5,1420.42) v2@1194.99,1434.93
PWM4: JP4.2 JP5.14 | length 1642.7
  Bottom Layer w15: JP4.2 724.41,1440.94 854.33,1311.02 854.33,685.04 988.19,551.18 988.19,245.67 JP5.14 ; JP4.2@646.89,1423.98 cw(c687.85,1383.01) 687.85,1440.94 cw(c687.85,1498.88) JP4.2@646.89,1457.91 ; JP5.14@940.55,220.53 ccw(c940.55,274.85) 978.96,236.44 ccw(c1017.37,198.03) JP5.14@963.05,198.03
TEMP1: JP6.1 P4.2 | length 538.3
  Bottom Layer w30: P4.2@1889.91,848.57 cw(c1861.75,820.41) 1901.57,820.41 cw(c1941.4,820.41) P4.2@1913.24,848.57 ; P4.2 1901.57,580.71 JP6.1 ; JP6.1@1979.57,486.22 ccw(c1939.74,486.22) 1967.9,514.38 ccw(c1996.06,542.54) JP6.1@1996.06,502.72
VDD33: DC1.1 DC3.1 JP5.17 JP5.18 JP6.2 OP1.1 P4.1 R17.2 R18.2 R19.2 R20.2 | length 4739
  Top Layer w30: v2(732.28,476.38) 732.28,673.23 822.83,763.78 948.82,763.78 1045.28,667.32 ; 740.16,551.18 v2(826.77,551.18) ; v2(1095.49,491.12) 1028.56,491.12 996.06,523.62 996.06,618.11 1045.28,667.32 ; v2(1346.46,590.55) 1346.46,653.54 ; P4.1 2143.7,958.66 2207.09,895.28 v2(2207.09,774.02) ; P4.1@1913.24,947 cw(c1941.4,918.84) 1941.4,958.66 cw(c1941.4,998.49) P4.1@1913.24,970.33 ; JP6.2@1984.4,376.13 ccw(c1956.24,347.97) 1956.24,387.8 ccw(c1956.24,427.62) JP6.2@1984.4,399.46 ; JP6.2 1647.64,387.8 1599.43,436 v2(1599.43,597.42) 1599.43,636.79 1582.68,653.54 1346.46,653.54 ; 1045.28,667.32 1059.06,653.54 1346.46,653.54
  Bottom Layer w30: DC1.1@717.97,407.75 cw(c663.45,353.23) 740.55,353.23 ; DC1.1@717.97,426.89 ccw(c683.41,461.45) v2@732.28,461.45 ; JP5.18@729.94,208.64 ccw(c704.34,234.24) 740.55,234.24 ccw(c776.76,234.24) JP5.18@751.16,208.64 ; JP5.17@729.94,287.42 cw(c704.34,261.82) 740.55,261.82 cw(c776.76,261.82) JP5.17@751.16,287.42 ; JP5.17@729.94,308.64 ccw(c704.34,334.24) 740.55,334.24 ccw(c776.76,334.24) JP5.17@751.16,308.64 ; v2(732.28,476.38) 732.28,424.57 DC1.1 740.55,401.81 JP5.17 JP5.18 ; R20.2 v2(826.77,551.18) ; v2(1095.49,491.12) R19.2 ; v2(1346.46,590.55) 1347.46,589.55 R18.2 ; R17.2 v2(1599.43,597.42) ; DC3.1@1809.92,939.12 cw(c1857.09,891.94) 1857.09,958.66 ; P4.1@1889.91,947 ccw(c1861.75,918.84) 1861.75,958.66 ccw(c1861.75,998.49) P4.1@1889.91,970.33 ; P4.1 1823.8,958.66 DC3.1 1772.66,941.95 1744.09,913.39 1744.09,488.19 1844.49,387.8 JP6.2 ; JP6.2@1984.4,376.13 ccw(c1956.24,347.97) 1956.24,387.8 ccw(c1956.24,427.62) JP6.2@1984.4,399.46 ; v2(2207.09,774.02) OP1.1 ; OP1.1@2257.09,759.85 ccw(c2222.88,725.64) 2222.88,774.02 ccw(c2222.88,822.4) OP1.1@2257.09,788.19
pads on no net: J2.2 OP1.3 OP1.5

## Polygon pours and split planes (outlines as drawn)
GND on Top Layer "Bottom Layer-No Net" (hatched 90Degree grid 7.87 track 8, remove dead copper, pour order 2): 2094.49,11.81 2086.61,19.68 2086.61,1842.52 2086.61,1909.45 2047.24,1948.82 2035.43,1937.01 62.99,1937.01 31.5,1905.51 31.5,1795.28 31.5,74.8 47.24,59.06 94.49,11.81 2086.61,11.81

## Keep-outs
Keep-Out Layer:
  the board outline again, w10

## Other copper
Top Layer:
  rectangle net NetOP1_4: 3429.13,866.14 3492.13,984.25
  rectangle net MOT2: 1287.4,1208.66 1334.65,1279.53
  rectangle net MOT3: 1078.74,1153.54 1122.05,1248.03
  rectangle net MOT4: 740.16,1208.66 783.46,1283.46
Bottom Layer:
  rectangle net 12V: 688.98,1035.43 751.97,1090.55
  rectangle net 12V: 976.38,1043.31 1047.24,1086.61
  rectangle net 12V: 1248.03,1031.5 1299.21,1094.49
  rectangle net 12V: 1500,1019.68 1551.18,1094.49
  rectangle net NetOP1_4: 3429.13,874.02 3492.13,988.19
  rectangle net MOT2: 1279.53,1161.42 1338.58,1279.53
  rectangle net MOT3: 1035.43,1157.48 1122.05,1244.09
  rectangle net MOT4: 740.16,1157.48 787.4,1283.46

## Silkscreen, mask and mechanical layers (free items; w line width, h text height)
Top Overlay:
  text "20210822" at 913.39,1011.81 h120
  text "MMS3100加热_V0.1" at 767.72,799.21 h100
Mechanical 1:
  the board outline again, w10